# Altium PCB PWR.PcbDoc
Units mm, origin at the board's own origin, x right, y up, seen from the top; angles counter-clockwise.
Board outline 90 x 47 mm, 2 copper layers (Top Layer, Bottom Layer); 39 components, 26 nets, 122 pads, 5 vias.
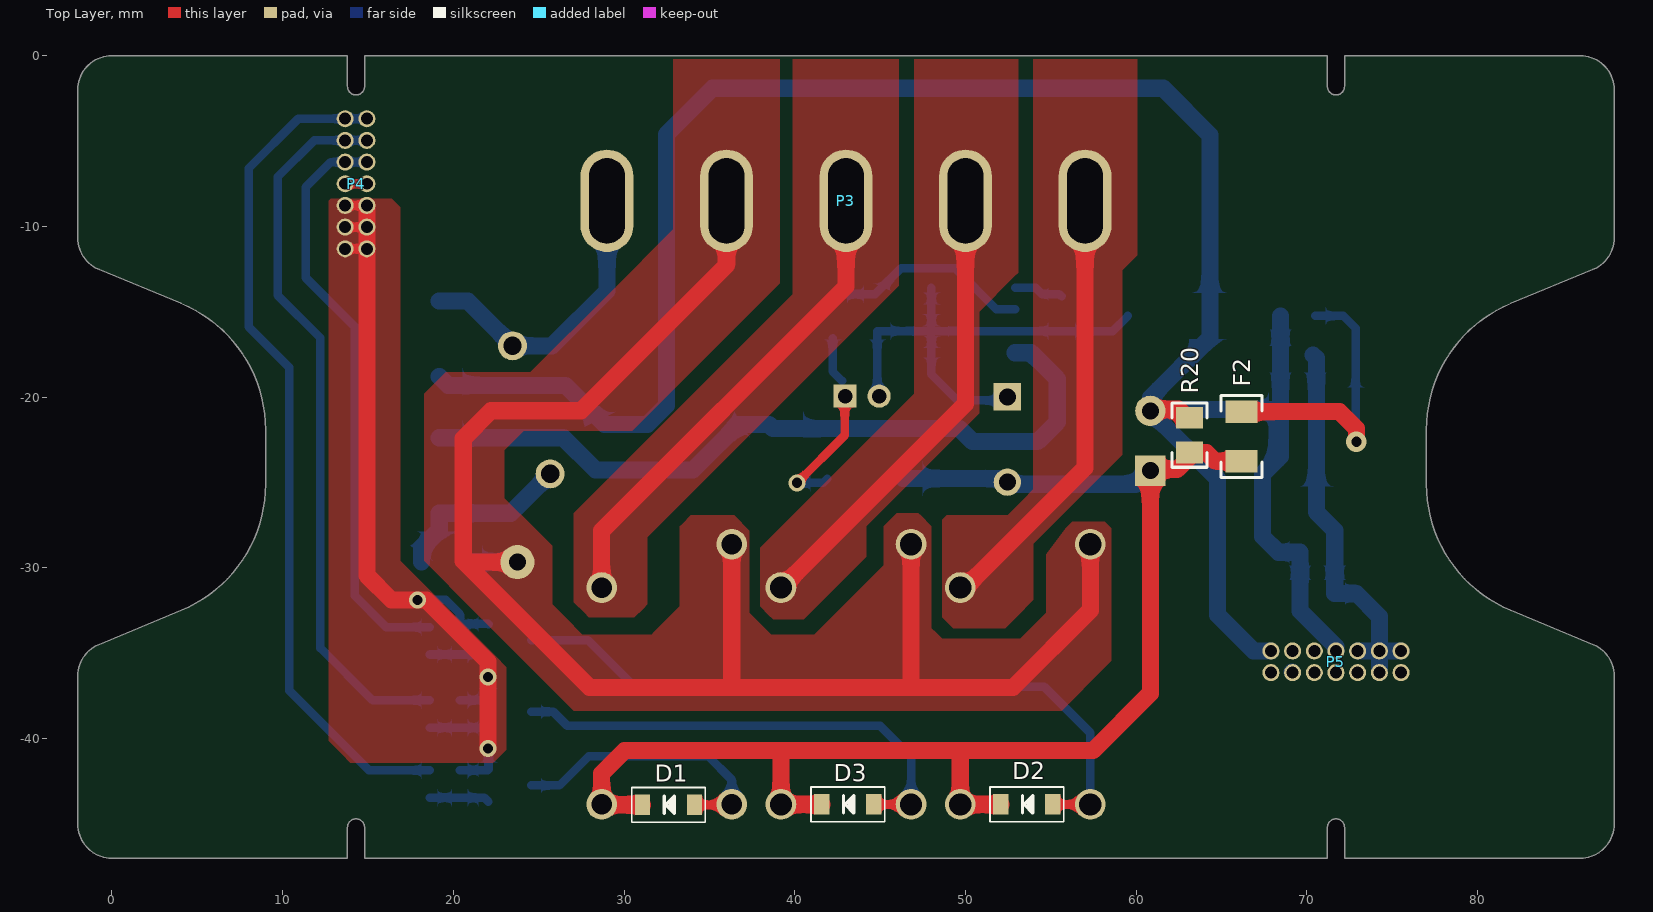
[diagram p0: Top Layer view]
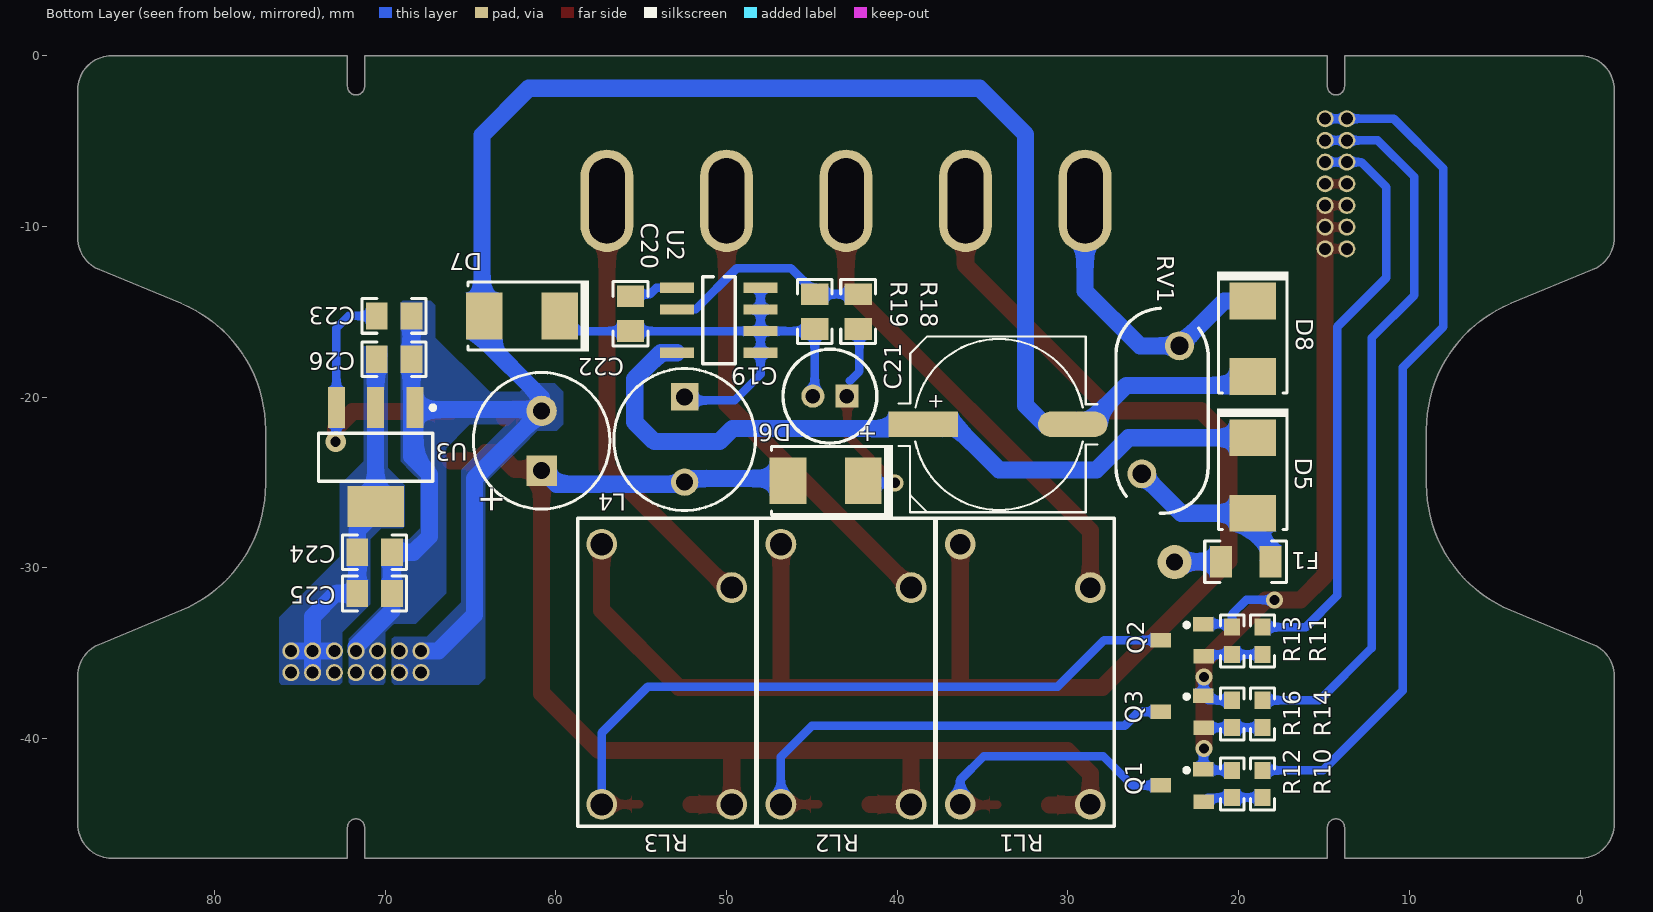
[diagram p1: Bottom Layer view, seen from below]

## Layer stack, top to bottom
Top Solder: solder mask 0.0102, Solder Resist, Dk 3.5
Top Layer: signal copper 0.0356
Dielectric 1: dielectric 0.32, FR-4, Dk 4.8
Bottom Layer: signal copper 0.0356
Bottom Solder: solder mask 0.0102, Solder Resist, Dk 3.5

## Board outline
0,-47 cw(c0,-45) -2,-45 -2,-36.336 cw(c0,-36.336) -0.765,-34.489 4.061,-32.489 ccw(c1,-25.098) 9,-25.098 9,-21.902 ccw(c1,-21.902) 4.061,-14.511 -0.765,-12.511 cw(c0,-10.664) -2,-10.664 -2,-2 cw(c0,-2) 0,0 13.8,0 13.8,-1.8 ccw(c14.3,-1.8) 14.8,-1.8 14.8,0 71.2,0 71.2,-1.8 ccw(c71.7,-1.8) 72.2,-1.8 72.2,0 86,0 cw(c86,-2) 88,-2 88,-10.664 cw(c86,-10.664) 86.765,-12.511 81.939,-14.511 ccw(c85,-21.902) 77,-21.902 77,-25.098 ccw(c85,-25.098) 81.939,-32.489 86.765,-34.489 cw(c86,-36.336) 88,-36.336 88,-45 cw(c86,-45) 86,-47 72.2,-47 72.2,-45.2 ccw(c71.7,-45.2) 71.2,-45.2 71.2,-47 14.8,-47 14.8,-45.2 ccw(c14.3,-45.2) 13.8,-45.2 13.8,-47

## Design rules (kind name [scope] priority, off if disabled: settings)
Clearance [All] p1: gap=0.2
ComponentClearance [All] p1 off: gap=0.05 collisioncheckmode=3 verticalgap=0.05 showdistances=FALSE
HoleSize [All] p1: absolutevalues=TRUE maxlimit=10 minlimit=0.025 maxpercent=80.000 minpercent=20.000
MinimumSolderMaskSliver [All] p1: minsoldermaskwidth=0.001
PolygonConnect [All] p1: connectstyle=Direct reliefconductorwidth=0.254 reliefentries=4 polygonreliefangle="90 Angle" airgapwidth=0.254
RoutingVias [All] p1: holewidth=0.711 width=1.27 viastyle="Through Hole" minholewidth=0.3 minwidth=0.3 maxholewidth=5 maxwidth=5
SilkToBoardRegionClearance [All] p1 off:
SilkToSilkClearance [All] p1 off: silktosilkclearance=0.001
SilkToSolderMaskClearance [IsPad] p1 off: minsilkscreentomaskgap=0.01 clearancetoexposedcopper=TRUE
SolderMaskExpansion [All] p1: expansion=0.102
Width [All] p1: maxlimit=2 minlimit=0.2 preferedwidth=0.254
24 further rules are at their usual default settings.

## Components (designator, comment, footprint, x,y, rotation, side; value= is the part's Value field where it differs from the comment)
C19 "ECA-1HHG100" NHG_500x1100 43.942,-19.939 r0 bottom
C20 "104" 0805_HV 55.626,-15.113 r90 bottom
C21 "400AX6R8M8x11" PANACAP-G-GENERIC 34.036,-21.59 r180 bottom
C22 "400AX6R8M8x11" CAPPRD350W60D800H1100 60.826,-22.553 r90 bottom locked
C23 "105" 0805_HV 69.469,-15.24 r0 bottom
C24 "105" 0805_HV 70.612,-29.083 r0 bottom
C25 "105" 0805_HV 70.612,-31.496 r0 bottom
C26 "105" 0805_HV 69.469,-17.78 r0 bottom
D1 "Diode SMD" DIO-SMD-123 32.604,-43.878 r180 top
D2 "Diode SMD" DIO-SMD-123 53.595,-43.855 r180 top
D3 "Diode SMD" DIO-SMD-123 43.11,-43.855 r180 top
D5 "US1M-13-F" SMB 19.177,-24.587 r90 bottom
D6 "US1M-13-F" SMB 44.196,-24.892 r180 bottom
D7 "US1M-13-F" SMB 61.976,-15.24 r180 bottom
D8 "US1M-13-F" SMB 19.177,-16.586 r90 bottom
F1 "Res" 1206 19.588,-29.638 r180 bottom
F2 "Res" 1206 66.167,-22.299 r90 top
L4 "7447480331" IND_WE-TI_8095 52.451,-22.479 r270 bottom
P3 "Header 5" CONWALL_SWITH-3 29,-8.5 r0 top locked
P4 "Header 7X2" CON14_1.27 13.665,-3.69 r270 top
P5 "Header 7X2" CON14_1.27 75.51,-34.865 r180 top
Q1 "C1815" SOT23B 23.306,-42.744 r270 bottom
Q2 "C1815" SOT23B 23.306,-34.235 r270 bottom
Q3 "C1815" SOT23B 23.306,-38.426 r270 bottom
R10 "1K" 0603 18.607,-42.655 r270 bottom
R11 "1K" 0603 18.607,-34.273 r270 bottom
R12 "10K" 0603 20.385,-42.655 r90 bottom
R13 "10K" 0603 20.385,-34.273 r90 bottom
R14 "1K" 0603 18.607,-38.553 r270 bottom
R16 "10K" 0603 20.385,-38.553 r90 bottom
R18 "13k" 0805_HV 42.291,-14.986 r270 bottom
R19 "2K" 0805_HV 44.831,-14.986 r90 bottom
R20 "3k3" 0805_HV 63.119,-22.225 r270 top
RL1 "Component_1" AZ7705#1 36.31,-31.15 r180 bottom locked
RL2 "Component_1" AZ7705#2 46.81,-31.15 r180 bottom locked
RL3 "Component_1" AZ7705#2 57.31,-31.15 r180 bottom locked
RV1 "S10K275E2" VAR_S10K275E2 24.487,-20.801 r270 bottom
U2 "LNK306" "SOP 7" 52.906,-13.589 r180 bottom
U3 "AMS1117-3.3V SOT223 _MH" SOT223 70.546,-23.513 r0 bottom

## Footprints (in the part's own frame and the unit in brackets; to place one, negate y for a bottom-side part, rotate by r counter-clockwise, add the part's x,y. Pads: shape width x height; smd on the part's side, far side on the other; paste and mask are expansions set on the pad)
0603 [mm] "0603 from SM-752 data"
  rect 1x0.95 smd: 1(-0.8,0) 2(0.8,0)
  silkscreen extent -1.52,-0.69 1.52,0.69, body extent -0.87,-0.47 0.87,0.47, height 1
0805_HV [mil] "0805 with 30mil clearance between pads"
  rect 50x63 smd: 1(-40,0) 2(40,0)
  silkscreen extent -74,-40 74,40, body extent -43,-29 43,29, height 57
1206 [mm] "1206 from SM-752 data"
  rect 1.3x1.85 smd: 1(1.45,0) 2(-1.45,0)
  silkscreen extent -2.4,-1.21 2.4,1.21, body extent -1.7,-0.9 1.7,0.9, height 1.35
AZ7705#1 [mm] "AZ7705"
  round 1.8 hole 1.2: 1(0,-12.7) 2(7.62,-12.7) 3(7.62,0) 4(0,2.54)
  silkscreen extent -1.4,-13.97 9.02,4.06, body extent -1.29,-13.8 8.91,4.4, height 15
AZ7705#2 [mm] "AZ7705"
  round 1.8 hole 1.3: 1(0,-12.7) 2(7.62,-12.7) 3(7.62,0) 4(0,2.54)
  silkscreen extent -1.4,-13.97 9.02,4.06, body extent -1.29,-13.8 8.91,4.4, height 15
CAPPRD350W60D800H1100 [mm] "Capacitor, Alum, 8x11mm"
  rect 1.78x1.78 hole 1: 1(-1.75,0)
  round 1.78 hole 1: 2(1.75,0)
  silkscreen extent -4,-4 4,4, body extent -4.02,-4.03 4.03,4.02, height 11.79
CON14_1.27 [mm]
  round 1 hole 0.7: 1(0,0) 2(0,1.27) 3(1.27,0) 4(1.27,1.27) 5(2.54,0) 6(2.54,1.27) 7(3.81,0) 8(3.81,1.27) 9(5.08,0) 10(5.08,1.27) 11(6.35,0) 12(6.35,1.27) 13(7.62,0) 14(7.62,1.27)
CONWALL_SWITH-3 [mm]
  oval 3.1x6 hole 2.1 slot 5 at 90 deg: 1(0,0) 2(7,0) 3(14,0) 4(21,0) 5(28,0)
DIO-SMD-123 [mm]
  rect 0.9x1.2 smd: 1(-1.524,0) 2(1.524,0)
  silkscreen extent -2.16,-1.02 2.16,1.02, body extent -1.94,-0.8 1.76,0.8, height 1.25
IND_WE-TI_8095 [mm] "Wurth WE-TI 8095"
  rect 1.6x1.6 hole 1: 1(-2.5,0)
  round 1.6 hole 1: 2(2.5,0)
  silkscreen extent -4.15,-4.15 4.15,4.15, body extent -4.15,-4.15 4.15,4.15, height 10
NHG_500x1100 [mm] "TH, 2-Leads, Dia 5mm,  Lead Spacing 2mm"
  rect 1.35x1.35 hole 0.85: 1(-1,0)
  round 1.35 hole 0.85: 2(1,0)
  silkscreen extent -2.75,-2.75 2.75,2.75, body extent -2.75,-2.75 2.75,2.75, height 12.51
PANACAP-G-GENERIC [mil]
  rect 160x59.06 smd: 1(-175,0)
  oval 160x59.06 smd: 2(170,0)
  silkscreen extent -231,-203 227,203, body extent -233,-203 223,203, height 402
SMB [mm] "Molded Diode, 2-Leads, Body 5.4x3.6mm, IPC Medium Density, based on OnSemi component dimensions"
  rect 2.159x2.743 smd: 1(2.21,0) 2(-2.21,0)
  silkscreen extent -3.17,-2.08 3.94,2.08, body extent -2.7,-1.8 2.7,1.8, height 2.32
"SOP 7" [mm]
  rect 2x0.6 smd: 1(0,0) 2(0,-1.27) 4(0,-3.81) 5(4.9,-3.81) 6(4.9,-2.54) 7(4.9,-1.27) 8(4.9,0)
  silkscreen extent 1.52,-4.45 3.43,0.63
SOT23B [mm] "SOT 23B"
  rect 0.85x1.2 smd: 1(0.95,1.25) 2(0,-1.25) 3(-0.94,1.245)
  silkscreen extent -1.02,0.13 -0.77,0.38, body extent -1.5,-1.2 1.5,1.3, height 1.06
SOT223 [mm]
  rect 1x2.4 smd: 1(-2.3,-2.9) 2(0,-2.9) 3(2.3,-2.9)
  rect 3.3x2.4 smd: 4(0,2.9)
  silkscreen extent -3.47,-3.02 3.35,1.4, body extent -3.25,-3.56 3.25,3.4, height 1.68
VAR_S10K275E2 [mm] "EPCOS"
  round 1.7 hole 1.067: 1(-3.81,1.016) 2(3.69,-1.184)
  silkscreen extent -6,-2.7 6,2.7, body extent -6.02,-2.7 5.98,2.7, height 15

## Part data
C19: "CAP, AL, 10 µF, 50 V, +/- 20%, TH"
C20 C23 C24 C25 C26: library part CM, "Cap SMD"
C21 C22: "CAP, AL, 6.8uF, 400V, +/-20%, TH"
D1 D2 D3: "Default Diode"
D5 D6 D7 D8: library part MURS160-13-F, "Diode, Ultrafast, 600V, 1A, SMB"
F1 F2: library part Res-SMD, "Resistor"
L4: "Inductor, Wirewound, Ferrite, 330 µH, 1.4 A, 0.3 ohm, TH"
P3: "Header, 5-Pin"
P4 P5: "Header, 7-Pin, Dual row"
Q1 Q2 Q3: "NPN 600mW, ECB"
R10 R11 R12 R13 R14 R16 R18 R19 R20: library part R, "Resistor 1/4W"
RV1: "Varistor 275V RMS 10MM Radial, TH"
U2: library part Component_1

## Free pads (board coordinates)
  round 2 hole 1: 0(23.749,-29.66)

## Via types
v1: diameter 1, hole 0.6, Top Layer to Bottom Layer, 4 vias
v2: diameter 1.2, hole 0.6, Top Layer to Bottom Layer, 1 vias

## Nets (pads, with @x,y where several pads share a name; then routed paths per layer and width w, separated by ;. In a path a pad name is that pad's centre, name@x,y a point inside that pad or via, vN(x,y) a via of type N, cw(c..) or ccw(c..) an arc to the next point about the centre after c; other vN are vias at no path point)
BP: C20.2 U2.1 | length 2.9
  Bottom Layer w0.5: U2.1 54.102,-13.589 54.483,-13.97 55.499,-13.97 C20.2
FB: R18.1 R19.2 U2.2 | length 12.2
  Bottom Layer w0.5: R18.1 44.704,-13.97 46.228,-12.446 49.403,-12.446 51.816,-14.859 U2.2
GND: C21.2 C22.2 C23.1 C24.1 C25.1 C26.1 D7.2 D8.2 P5.7 P5.8 P5.9 P5.10 P5.11 P5.12 P5.13 P5.14 R20.1 U3.1 | length 135
  Top Layer w1: C22.2@60.833,-20.729 60.861,-20.701 62.484,-20.701 R20.1@62.992,-21.209
  Bottom Layer w1: D8.2 19.685,-19.304 26.576,-19.304 28.862,-21.59 C21.2 31.376,-21.59 32.477,-20.489 32.477,-4.607 35.179,-1.905 61.581,-1.905 64.312,-4.636 64.312,-16.544 60.833,-20.022 60.833,-20.837 64.77,-24.774 64.77,-32.766 66.862,-34.858 P5.13@67.89,-34.858 ; C22.2@61.403,-20.729 68.13,-20.729 U3.1 68.246,-23.677 ; C23.1 C26.1 68.453,-23.47 68.246,-23.677 ; P5.12@69.131,-36.099 P5.12@69.16,-36.128 ; P5.7@71.7,-34.858 71.7,-34.616 69.596,-32.512 C25.1 C24.1 68.326,-29.083 67.395,-28.152 67.395,-24.528 68.246,-23.677
GND_RL: P4.9 P4.10 P4.11 P4.12 P4.13 P4.14 Q1.3 Q2.3 Q3.3 R12.2 R13.2 R16.2 | length 50.9
  Top Layer w0.5: P4.13 P4.14 ; P4.11 P4.12 ; P4.9 P4.10
  Top Layer w1: P4.10 P4.12 P4.14 14.935,-30.429 16.383,-31.877 v1(17.907,-31.877) 18.415,-31.877 22.036,-35.498 v1(22.036,-36.394) v1(22.036,-40.585)
  Bottom Layer w0.5: v1(17.907,-31.877) 19.558,-31.877 20.385,-32.704 R13.2 20.583,-33.274 Q2.3@22.04,-33.274 ; R12.2 22.01,-41.855 Q1.3 22.061,-40.61 v1(22.036,-40.585) ; R16.2 21.794,-37.753 Q3.3 22.061,-36.419 v1(22.036,-36.394) ; Q2.3@22.036,-33.269 Q2.3@22.04,-33.274 ; Q2.3 Q2.3@22.04,-33.274
L: F1.2 P3.2 pad.0 RL1.4 RL2.4 RL3.4 | length 98.9
  Top Layer w1: pad.0 20.654,-29.66 20.58,-29.586 ; P3.2 36,-12.271 27.476,-20.795 22.214,-20.795 20.58,-22.429 20.58,-29.586 ; RL1.4 36.31,-36.913 36.221,-37.002 ; RL2.4 46.81,-36.95 46.758,-37.002 ; RL3.4 57.31,-32.479 52.787,-37.002 46.758,-37.002 ; 20.58,-29.586 20.58,-29.597 27.985,-37.002 36.221,-37.002 ; 36.221,-37.002 46.758,-37.002
  Bottom Layer w1: F1.2 23.727,-29.638 pad.0
L1: P3.3 RL1.3 | length 28.6
  Top Layer w1: RL1.3 28.69,-27.825 43,-13.515 P3.3
L2: P3.4 RL2.3 | length 27.2
  Top Layer w1: RL2.3 39.238,-31.15 50,-20.388 P3.4
L3: P3.5 RL3.3 | length 25.9
  Top Layer w1: RL3.3 49.989,-31.15 57,-24.139 P3.5
MCU_VCC: C24.2 C25.2 C26.2 P5.1 P5.2 P5.3 P5.4 P5.5 P5.6 U3.2 U3.4 | length 23.5
  Bottom Layer w1: C26.2@70.358,-17.526 70.546,-17.714 U3.2 U3.4 70.546,-26.731 71.628,-27.813 C24.2 C25.2 72.898,-31.496 74.24,-32.838 P5.3@74.24,-34.858 ; P5.5@72.97,-34.858 P5.3@74.24,-34.858 ; P5.4@74.24,-36.128 P5.3@74.24,-34.858 ; P5.1@75.51,-34.858 P5.3@74.24,-34.858
N: D8.1 P3.1 RV1.1 | length 17.5
  Bottom Layer w1: D8.1 20.856,-14.376 RV1.1 25.786,-16.991 29,-13.777 P3.1
NetC19_1: C19.1 D6.1 R18.2 | length 11.1
  Top Layer w0.5: v1(40.132,-25.019) 42.926,-22.225 42.926,-20.05 C19.1@42.688,-19.812
  Bottom Layer w0.5: v1(40.132,-25.019) 41.656,-25.019 D6.1@41.91,-24.765 ; R18.2@42.215,-16.561 42.215,-18.491 42.774,-19.05
NetC23_2: C23.2 F2.1 U3.3 | length 17.2
  Top Layer w1: F2.1 71.903,-20.849 72.898,-21.844 v2(72.898,-22.606)
  Bottom Layer w0.5: C23.2 72.136,-15.24 72.846,-15.95 U3.3 72.846,-22.554 v2(72.898,-22.606)
NetD1_1: D1.1 Q1.2 RL1.1 | length 16.7
  Top Layer w0.5: D1.1 36.282,-43.878 RL1.1
  Bottom Layer w0.5: Q1.2 26.217,-42.744 27.94,-41.021 34.92,-41.021 36.31,-42.411 RL1.1
NetD2_1: D2.1 Q2.2 RL3.1 | length 41.4
  Top Layer w0.5: D2.1 57.305,-43.855 RL3.1
  Bottom Layer w0.5: Q2.2 27.885,-34.235 30.607,-36.957 54.61,-36.957 57.31,-39.657 RL3.1
NetD3_1: D3.1 Q3.2 RL2.1 | length 28.3
  Top Layer w0.5: D3.1 46.805,-43.855 RL2.1
  Bottom Layer w0.5: Q3.2 25.853,-38.426 26.67,-39.243 44.992,-39.243 46.81,-41.061 RL2.1
NetD5_2: D5.2 F1.1 RV1.2 | length 10.7
  Bottom Layer w1: F1.1 18.138,-28.82 19.177,-27.781 D5.2 23.365,-26.797 RV1.2
NetQ1_1: Q1.1 R10.2 R12.1 | length 3.5
  Bottom Layer w0.5: R10.2 R12.1 21.817,-43.455 Q1.1
NetQ2_1: Q2.1 R11.2 R13.1 | length 3.5
  Bottom Layer w0.5: R11.2 R13.1 21.944,-35.073 Q2.1
NetQ3_1: Q3.1 R14.2 R16.1 | length 3.5
  Bottom Layer w0.5: R14.2 22.033,-39.353 Q3.1
RL1C: P4.1 P4.2 R10.1 | length 49.9
  Bottom Layer w0.5: P4.2 P4.1 10.918,-3.69 8.006,-6.602 8.006,-15.88 10.386,-18.26 10.386,-37.183 15.058,-41.855 R10.1
RL2C: P4.3 P4.4 R14.1 | length 42.4
  Bottom Layer w0.5: P4.4 P4.3 11.853,-4.96 9.709,-7.104 9.709,-14.027 12.215,-16.533 12.215,-34.694 15.274,-37.753 R14.1
RL3C: P4.5 P4.6 R11.1 | length 34.5
  Bottom Layer w0.5: P4.6 P4.5 12.82,-6.23 11.353,-7.697 11.353,-13.004 14.224,-15.875 14.224,-31.623 16.074,-33.473 R11.1
RL4C: P4.7 P4.8 | length 1.3
  Top Layer w0.5: P4.7 P4.8
S: C19.2 C20.1 D7.1 L4.1 R19.1 U2.5 U2.6 U2.7 U2.8 | length 29
  Bottom Layer w0.5: C19.2@44.815,-19.939 44.831,-19.923 44.831,-16.129 U2.6 ; U2.8 U2.7 U2.6 ; L4.1@52.451,-20.193 49.53,-20.193 48.006,-18.669 U2.5 U2.6 ; D7.1@59.512,-15.24 58.623,-16.129 C20.1 U2.6
VCC_RELAY: C22.1 D1.2 D2.2 D3.2 D6.2 F2.2 L4.2 R20.2 RL1.2 RL2.2 RL3.2 | length 83.5
  Top Layer w1: D1.2 28.718,-43.878 RL1.2 28.69,-42.049 30.032,-40.707 39.143,-40.707 ; D3.2 39.195,-43.855 RL2.2 39.19,-40.754 39.143,-40.707 ; D2.2 49.695,-43.855 RL3.2 49.69,-40.772 49.625,-40.707 ; C22.1 60.826,-37.345 57.464,-40.707 49.625,-40.707 ; C22.1@60.833,-24.229 62.385,-24.229 63.119,-23.495 R20.2 64.107,-23.241 64.615,-23.749 F2.2 ; 39.143,-40.707 49.625,-40.707
  Bottom Layer w1: D6.2@46.33,-24.765 52.023,-24.765 52.358,-25.1 59.962,-25.1 C22.1@60.833,-24.229
VIN1: C21.1 D5.1 U2.4 | length 44.6
  Bottom Layer w1: D5.1 26.441,-22.377 28.321,-24.257 34.036,-24.257 36.703,-21.59 C21.1 38.735,-21.844 49.657,-21.844 50.419,-22.606 54.229,-22.606 55.372,-21.463 55.372,-18.923 53.848,-17.399 U2.4

## Polygon pours and split planes (outlines as drawn)
GND on Bottom Layer "Bottom Layer-No Net" (solid, remove dead copper, pour order 2): 59.563,-19.685 59.563,-21.209 59.563,-21.59 59.817,-21.844 59.944,-21.971 60.96,-21.971 61.087,-21.971 61.976,-22.86 64.135,-25.019 64.135,-29.21 64.135,-36.449 64.516,-36.83 69.215,-36.83 69.469,-36.83 69.596,-36.703 69.596,-35.941 69.596,-34.163 69.469,-34.036 68.961,-34.036 67.564,-34.036 66.421,-32.893 65.532,-32.004 65.532,-24.638 65.532,-24.257 63.246,-21.971 62.103,-20.828 62.103,-19.939 62.103,-19.685 61.722,-19.304 61.595,-19.177 60.071,-19.177
GND on Bottom Layer "Bottom Layer-No Net" (solid, remove dead copper, pour order 4): 61.043,-19.812 61.17,-19.685 62.865,-19.685 63.881,-19.685 64.135,-19.431 67.056,-16.51 67.056,-14.986 67.056,-14.605 67.31,-14.351 67.818,-14.351 68.961,-14.351 69.088,-14.478 69.088,-14.859 69.088,-23.749 68.453,-24.384 67.945,-24.892 67.945,-26.924 67.945,-27.686 68.326,-28.067 68.58,-28.321 69.469,-28.321 69.977,-28.321 70.231,-28.702 70.231,-28.829 70.231,-32.258 70.866,-32.893 72.136,-34.163 72.136,-35.56 72.136,-36.703 72.009,-36.83 71.628,-36.83 70.104,-36.83 69.977,-36.703 69.977,-35.941 69.977,-33.782 69.596,-33.401 69.469,-33.274 68.453,-33.274 68.199,-33.274 66.802,-31.877 66.421,-31.496 66.421,-28.067 66.421,-22.987 65.151,-21.717 65.024,-21.59 63.627,-21.59 60.579,-21.59 60.452,-21.463
MCU_VCC on Bottom Layer "Bottom Layer-No Net" (solid, remove dead copper, pour order 6): 69.85,-17.018 69.85,-24.13 69.088,-24.892 68.834,-25.146 68.834,-26.289 68.834,-27.559 68.961,-27.686 69.469,-27.686 70.231,-27.686 70.612,-28.067 70.866,-28.321 70.866,-29.337 70.866,-32.131 71.12,-32.385 72.517,-33.782 72.517,-35.941 72.517,-36.703 72.644,-36.83 73.025,-36.83 76.073,-36.83 76.2,-36.703 76.2,-32.893 74.041,-30.734 72.644,-29.337 72.644,-24.892 72.39,-24.892 71.628,-24.13 71.247,-23.749 71.247,-21.336 71.247,-17.018
L on Top Layer "Bottom Layer-No Net" (solid, remove dead copper, pour order 5): 32.893,0 32.893,-10.16 29.21,-13.843 24.511,-18.542 22.86,-18.542 19.558,-18.542 18.415,-19.685 18.288,-19.812 18.288,-21.971 18.288,-29.591 21.209,-32.512 27.051,-38.354 33.147,-38.354 55.626,-38.354 58.166,-35.814 58.547,-35.433 58.547,-31.115 58.547,-27.686 58.166,-27.305 56.642,-27.305 56.261,-27.305 55.88,-27.686 54.737,-29.21 54.737,-32.131 54.737,-32.639 53.213,-34.163 50.419,-34.163 48.641,-34.163 48.26,-33.782 48.006,-33.528 48.006,-32.131 48.006,-27.559 47.371,-26.924 47.244,-26.797 46.355,-26.797 45.974,-26.797 45.593,-27.178 45.212,-27.559 45.212,-28.067 45.212,-29.845 43.434,-31.623 41.148,-33.909 39.497,-33.909 38.608,-33.909 37.338,-32.639 37.338,-30.861 37.338,-27.813 36.449,-26.924 35.814,-26.924 33.909,-26.924 33.401,-27.432 33.274,-27.559 33.274,-29.464 33.274,-32.258 31.75,-33.782 31.623,-33.909 29.083,-33.909 27.559,-33.909 26.543,-32.893 25.781,-32.131 25.781,-29.591 25.781,-28.702 24.765,-27.686 22.987,-25.908 22.987,-24.13 22.987,-23.114 23.495,-22.606 24.13,-21.971 27.178,-21.971 30.48,-21.971 33.655,-18.796 39.116,-13.335 39.116,-6.477 39.116,0
L1 on Top Layer "Bottom Layer-No Net" (solid, remove dead copper, pour order 7): 39.878,0 39.878,-13.97 37.846,-16.002 27.051,-26.797 27.051,-29.845 27.051,-32.004 27.686,-32.639 27.94,-32.893 29.972,-32.893 30.607,-32.893 31.115,-32.385 31.369,-32.131 31.369,-29.464 31.369,-28.194 32.639,-26.924 46.101,-13.462 46.101,-2.921 46.101,0
L2 on Top Layer "Bottom Layer-No Net" (solid, remove dead copper, pour order 9): 46.99,0 46.99,-19.812 45.085,-21.717 37.973,-28.829 37.973,-30.607 37.973,-32.258 38.481,-32.766 38.735,-33.02 40.132,-33.02 40.513,-33.02 41.529,-32.004 44.196,-29.337 44.196,-28.067 44.196,-27.559 44.958,-26.797 50.8,-20.955 50.8,-15.113 50.8,-14.986 52.832,-12.954 53.086,-12.7 53.086,-4.318 53.086,0
L3 on Top Layer "Bottom Layer-No Net" (solid, remove dead copper, pour order 11): 53.975,0 53.975,-25.4 53.34,-26.035 50.419,-28.956 49.911,-28.956 49.276,-28.956 48.895,-29.337 48.641,-29.591 48.641,-32.258 48.641,-32.893 49.276,-33.528 50.546,-33.528 52.324,-33.528 52.959,-32.893 53.975,-31.877 53.975,-30.353 53.975,-28.575 55.245,-27.305 59.182,-23.368 59.182,-13.716 59.182,-12.573 59.69,-12.065 60.071,-11.684 60.071,-8.255 60.071,0
L3 on Top Layer "Bottom Layer-No Net" (solid, remove dead copper, pour order 13): 48.641,-31.115 48.641,-27.178 48.895,-26.924 52.959,-26.924 52.959,-31.877 52.197,-32.639 49.911,-32.639
GND_RL on Top Layer "Bottom Layer-No Net" (solid, remove dead copper, pour order 15): 15.367,-8.382 15.357,-8.392 14.481,-8.392 12.817,-8.392 12.7,-8.509 12.7,-8.763 12.7,-40.132 13.462,-40.894 13.97,-41.402 21.463,-41.402 22.352,-41.402 22.86,-40.894 23.114,-40.64 23.114,-38.608 23.114,-35.814 22.479,-35.179 16.891,-29.591 16.891,-11.684 16.891,-8.89 16.383,-8.382

## Silkscreen, mask and mechanical layers (free items; w line width, h text height)
Top Solder:
  lines w1: 28.829,-31.369 28.829,-27.686 42.926,-13.589 42.926,-8.128 ; 35.052,-36.195 35.052,-30.226 36.31,-28.968 36.31,-28.61 ; 35.814,-8.255 35.814,-11.811 27.432,-20.193 22.606,-20.193 20.32,-22.479 20.32,-26.231 23.749,-29.66 23.749,-32.639 27.305,-36.195 53.975,-36.195 57.31,-32.86 57.31,-28.61 ; 39.19,-31.15 39.19,-30.025 48.895,-20.32 48.895,-13.97 49.911,-12.954 49.911,-9.652 ; 46.609,-36.195 46.609,-28.829 ; 49.69,-31.15 49.876,-31.15 57.023,-24.003 57.023,-8.763
Mechanical 2:
  circle w0.1: c96.171,-49 r0.003
  circle w0.1: c86,-49 r0.003
  circle w0.1: c86,0 r0.003
  circle w0.1: c-2,9.526 r0.003
  circle w0.1: c-2,-2 r0.003
  circle w0.1: c88,-2 r0.003
  lines w0.1: -2,-45 ccw(c0,-45) 0,-47 13.8,-47 13.8,-45.2 cw(c14.3,-45.2) 14.8,-45.2 14.8,-47 71.2,-47 71.2,-45.2 cw(c71.7,-45.2) 72.2,-45.2 72.2,-47 86,-47 ccw(c86,-45) 88,-45 88,-36.336 ccw(c86,-36.336) 86.765,-34.489 81.939,-32.489 cw(c85,-25.098) 77,-25.098 77,-21.902 cw(c85,-21.902) 81.939,-14.511 86.765,-12.511 ccw(c86,-10.664) 88,-10.664 88,-2 ccw(c86,-2) 86,0 72.2,0 72.2,-1.8 cw(c71.7,-1.8) 71.2,-1.8 71.2,0 14.8,0 14.8,-1.8 cw(c14.3,-1.8) 13.8,-1.8 13.8,0 0,0 ccw(c0,-2) -2,-2 -2,-10.664 ccw(c0,-10.664) -0.765,-12.511 4.061,-14.511 cw(c1,-21.902) 9,-21.902 9,-25.098 cw(c1,-25.098) 4.061,-32.489 -0.765,-34.489 ccw(c0,-36.336) -2,-36.336 -2,-45
Mechanical 3:
  drawing of 153 lines, arcs and shapes, not listed

## Text inside footprints (layer, text, board x,y; h text height)
C19: Bottom Overlay "+" at 41.148,-21.717 h1.02 r180; Mechanical 5 "+" at 40.142,-19.539 h1.02 r180
C21: Bottom Overlay "+" at 38.236,-20.615 h0.89
C22: Bottom Overlay "+" at 63.112,-26.871 h1.5 r270; Mechanical 5 "+" at 60.826,-28.053 h1.5 r270